# Altium PCB main_pcb.PcbDoc
Units mm, origin at the board's own origin, x right, y up, seen from the top; angles counter-clockwise.
Board outline 20 x 50 mm, 2 copper layers (Top Layer, Bottom Layer); 25 components, 16 nets, 100 pads, 16 vias.
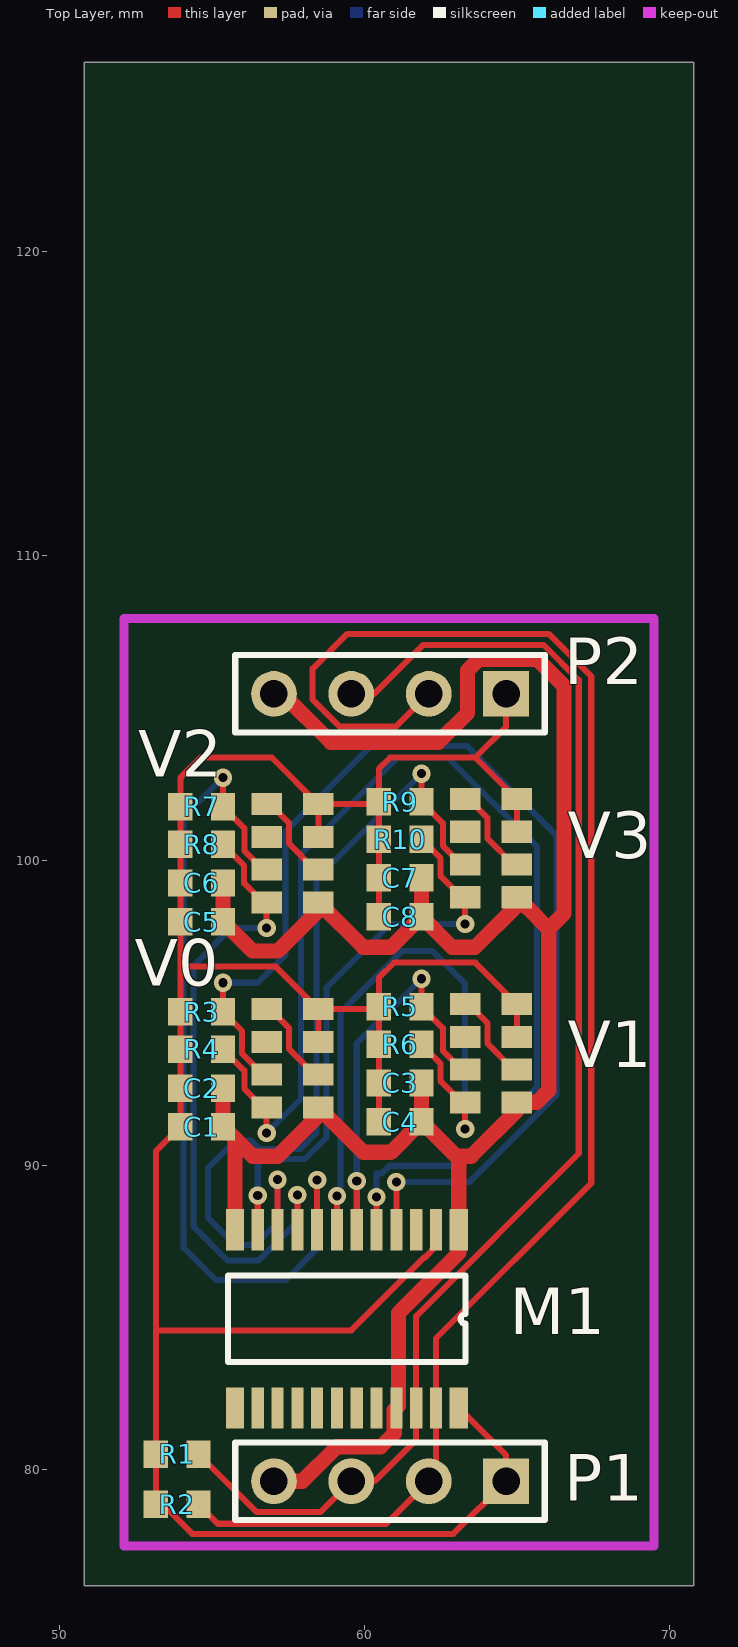
[diagram p0: Top Layer view]
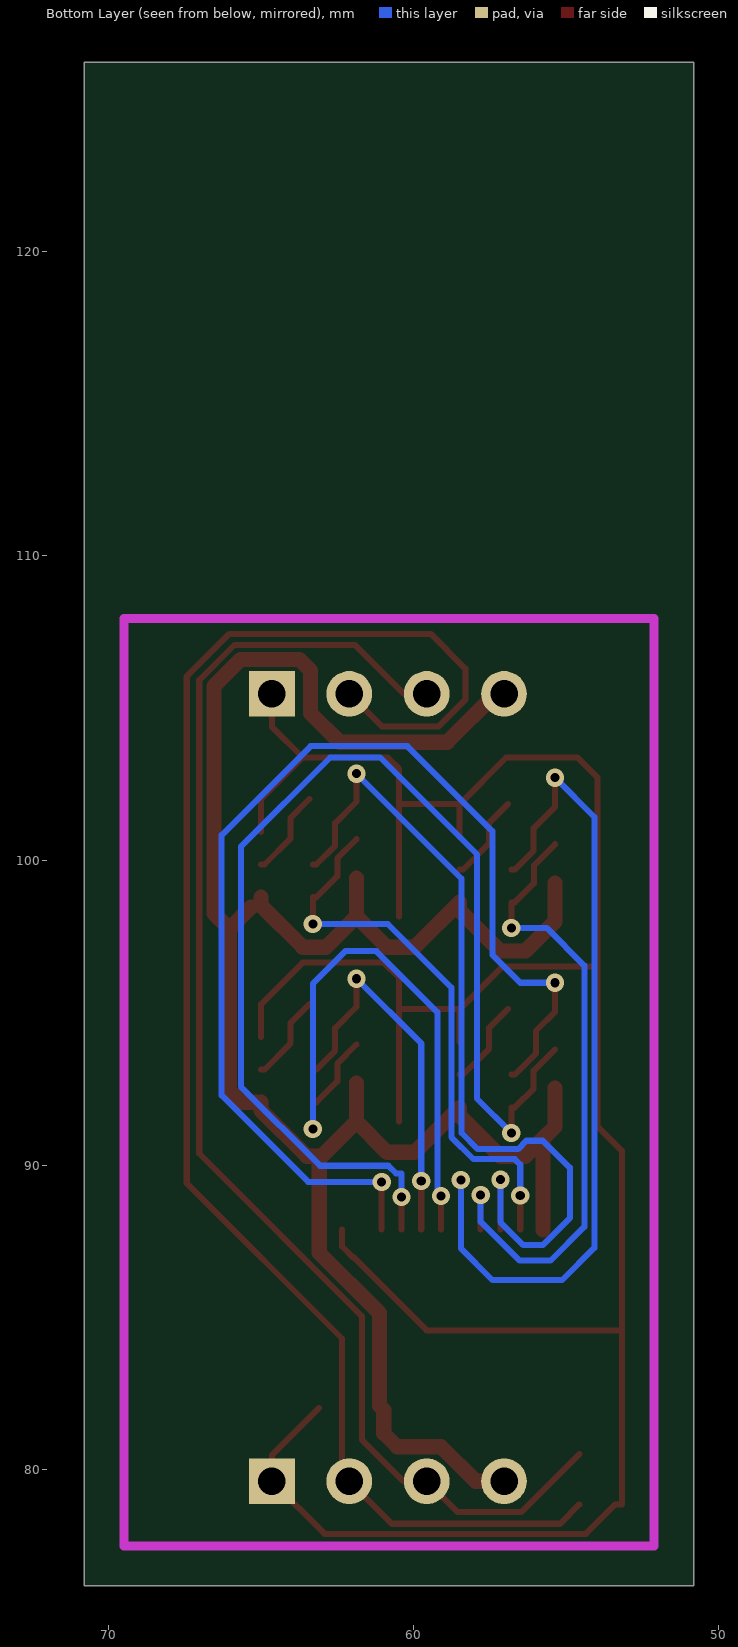
[diagram p1: Bottom Layer view, seen from below]

## Layer stack, top to bottom
Top Solder: solder mask 0.0102, Solder Resist, Dk 3.5
Top Layer: signal copper 0.0356
Dielectric 1: dielectric 0.32, FR-4, Dk 4.8
Bottom Layer: signal copper 0.0356
Bottom Solder: solder mask 0.0102, Solder Resist, Dk 3.5

## Board outline
50.8,76.2 70.8,76.2 70.8,126.2 50.8,126.2

## Design rules (kind name [scope] priority, off if disabled: settings)
Clearance [All] p1: gap=0.13
FabricationTestPointUsage TestPointUsage [All] p1: valid=0 allowmultiple=FALSE
FabricationTestpoint Testpoint [All] p1: side=3 testpointundercomponent=TRUE minsize=1.016 maxsize=2.54 preferedsize=1.524 minholesize=0 maxholesize=1.016 preferedholesize=0.813 testpointgrid=0.025 allowsidetop=TRUE allowsidebottom=TRUE usegrid=TRUE gridtolerance=0
HoleSize [All] p1: absolutevalues=TRUE maxlimit=3.9 minlimit=0.2 maxpercent=80.000 minpercent=20.000
HoleToHoleClearance [All] p1: gap=0.3 allowstackedmicrovias=TRUE
MinimumSolderMaskSliver [All] p1: minsoldermaskwidth=0.1
PlaneConnect [All] p1: planeconnectstyle=Relief reliefexpansion=0.5 reliefentries=4 reliefconductorwidth=0.4 reliefairgap=0.4
PolygonConnect [All] p1: connectstyle=Relief reliefconductorwidth=0.4 reliefentries=4 polygonreliefangle="90 Angle" airgapwidth=0.4
RoutingVias [All] p1: holewidth=0.3 width=0.6 viastyle="Through Hole" minholewidth=0.3 minwidth=0.6 maxholewidth=0.3 maxwidth=0.6
SilkToBoardRegionClearance UnpouredPolygon [All] p2:
SilkToSilkClearance [All] p1: silktosilkclearance=0
SilkToSolderMaskClearance SilkscreenOverComponentPads [IsPad] p1: minsilkscreentomaskgap=0 clearancetoexposedcopper=TRUE
SolderMaskExpansion [All] p1: expansion=-0.01
Width Power_Width [(InNet('5V') OR InNet('3V3') OR InNet('VCC') OR InNet('GND'))] p1: maxlimit=1 minlimit=0.4 preferedwidth=0.5 minimp=50.000000 maximp=50.000000 favimp=50.000000
Width [All] p2: maxlimit=0.2 minlimit=0.2 preferedwidth=0.2 minimp=50.000000 maximp=50.000000 favimp=50.000000
21 further rules are at their usual default settings.

## Components (designator, comment, footprint, x,y, rotation, side; value= is the part's Value field where it differs from the comment)
C1 "Cap" 1608[0603] 54.65,91.263 r180 top
C2 "Cap" 1608[0603] 54.65,92.533 r180 top
C3 "Cap" 1608[0603] 61.166,92.7 r180 top
C4 "Cap" 1608[0603] 61.166,91.43 r180 top
C5 "Cap" 1608[0603] 54.65,97.994 r180 top
C6 "Cap" 1608[0603] 54.65,99.264 r180 top
C7 "Cap" 1608[0603] 61.166,99.431 r180 top
C8 "Cap" 1608[0603] 61.166,98.161 r180 top
M1 "PCA9547" TSSOP24 62.992,87.884 r270 top
P1 "Header 4" HDR1X4 64.643,79.629 r180 top
P2 "Header 4" HDR1X4 64.643,105.471 r180 top
R1 "Res1" 1608[0603] 53.848,80.518 r180 top
R2 "Res1" 1608[0603] 53.848,78.867 r180 top
R3 "Res1" 1608[0603] 54.65,95.036 r180 top
R4 "Res1" 1608[0603] 54.65,93.803 r180 top
R5 "Res1" 1608[0603] 61.166,95.202 r180 top
R6 "Res1" 1608[0603] 61.166,93.97 r180 top
R7 "Res1" 1608[0603] 54.65,101.767 r180 top
R8 "Res1" 1608[0603] 54.65,100.534 r180 top
R9 "Res1" 1608[0603] 61.166,101.933 r180 top
R10 "Res1" 1608[0603] 61.166,100.701 r180 top
V0 "VCNL4040" SOP8 58.333,91.898 r180 top
V1 "VCNL4040" SOP8 64.849,92.065 r180 top
V2 "VCNL4040" SOP8 58.333,98.629 r180 top
V3 "VCNL4040" SOP8 64.849,98.796 r180 top

## Footprints (in the part's own frame and the unit in brackets; to place one, negate y for a bottom-side part, rotate by r counter-clockwise, add the part's x,y. Pads: shape width x height; smd on the part's side, far side on the other; paste and mask are expansions set on the pad)
1608[0603] [mm] "Chip Capacitor, Body 1.6x0.8mm, IPC High Density"
  rect 0.8x0.9 smd: 1(-0.7,0) 2(0.7,0)
  body extent -0.87,-0.48 0.87,0.48, height 1.3
HDR1X4 [mm] "Connector; Header; 4 Position"
  rect 1.5x1.5 hole 0.9: 1(0,0)
  round 1.5 hole 0.9: 2(2.54,0) 3(5.08,0) 4(7.62,0)
  silkscreen extent -1.27,-1.27 8.89,1.27
SOP8 [mm]
  rect 1x0.725 smd: 1(-0.15,0) 2(-0.15,-1.075) 3(-0.15,-2.15) 4(-0.15,-3.225) 5(1.55,-3.225) 6(1.55,-2.15) 7(1.55,-1.075) 8(1.55,0)
TSSOP24 [mm]
  rect 1.35x0.6 smd: 1(0,0.1) 12(0,-7.25) 13(5.85,-7.25) 24(5.85,0.1)
  rect 1.35x0.4 smd: 2(0,-0.65) 3(0,-1.3) 4(0,-1.95) 5(0,-2.6) 6(0,-3.25) 7(0,-3.9) 8(0,-4.55) 9(0,-5.2) 10(0,-5.85) 11(0,-6.5) 14(5.85,-6.5) 15(5.85,-5.85) 16(5.85,-5.2) 17(5.85,-4.55) 18(5.85,-3.9) 19(5.85,-3.25) 20(5.85,-2.6) 21(5.85,-1.95) 22(5.85,-1.3) 23(5.85,-0.65)
  silkscreen extent 1.51,-7.48 4.34,0.33

## Part data
C1 C2 C3 C4 C5 C6 C7 C8: "Capacitor"
P1 P2: "Header, 4-Pin"
R1 R2 R3 R4 R5 R6 R7 R8 R9 R10: "Resistor"
V0 V1 V2 V3: library part Component_1

## Via types
v1: diameter 0.6, hole 0.3, Top Layer to Bottom Layer, 16 vias

## Nets (pads, with @x,y where several pads share a name; then routed paths per layer and width w, separated by ;. In a path a pad name is that pad's centre, name@x,y a point inside that pad or via, vN(x,y) a via of type N, cw(c..) or ccw(c..) an arc to the next point about the centre after c; other vN are vias at no path point)
GND: C1.1 C2.1 C3.1 C4.1 C5.1 C6.1 C7.1 C8.1 M1.1 M1.12 M1.21 P1.4 P2.4 V0.1 V1.1 V2.1 V3.1 | length 76.9
  Top Layer w0.5: C2.1 C1.1 C1.1@55.742,90.871 ; C6.1 C5.1 56.316,97.028 57.15,97.028 58.483,98.361 V2.1 59.957,97.155 60.861,97.155 C8.1 ; M1.12 C1.1@55.742,90.871 ; P1.4 57.965,79.629 59.095,80.759 60.529,80.759 60.972,81.202 60.972,81.964 M1.21 ; P2.4 57.303,105.471 58.888,103.886 62.423,103.886 63.373,104.836 63.373,106.238 63.736,106.601 65.672,106.601 66.548,105.725 66.548,98.263 66.04,97.755 ; M1.21@61.112,82.104 61.112,85.148 63.092,87.128 M1.1 63.092,90.204 ; C3.1 C4.1 ; C7.1 C8.1 ; V1.1 64.999,91.796 63.5,90.297 62.999,90.297 C4.1 ; V3.1 64.999,98.527 63.627,97.155 62.872,97.155 C8.1 ; V1.1@65.15,92.065 65.649,92.065 66.04,92.456 66.04,97.755 ; V3.1@65.324,98.471 66.04,97.755 ; C1.1@55.742,90.871 56.316,90.297 57.15,90.297 58.483,91.63 V0.1 59.957,90.424 60.861,90.424 C4.1
NetC1_2: C1.2 C2.2 C3.2 C4.2 C5.2 C6.2 C7.2 C8.2 M1.2 M1.24 P1.1 P2.1 R1.2 R2.2 R3.2 R4.2 R5.2 R6.2 R7.2 R8.2 R9.2 R10.2 V0.3 V0.4 V1.3 V1.4 V2.3 V2.4 V3.3 V3.4 | length 92
  Top Layer w0.2: 53.95,96.52 57.086,96.52 V0.4 ; V0.3 V0.4 ; V2.3 V2.4 ; R5.2@60.387,95.123 V0.4 ; R9.2@60.387,101.854 V2.4 ; C4.2 C3.2 R6.2 R5.2 60.466,96.153 60.965,96.652 63.637,96.652 V1.4 V1.3 ; C8.2 C7.2 R10.2 R9.2 60.466,103.011 60.838,103.383 63.637,103.383 ; M1.2 62.342,87.334 61.987,86.979 61.96,86.979 59.563,84.582 53.148,84.582 ; M1.24 64.643,80.483 P1.1 62.916,77.902 54.338,77.902 53.373,78.867 R2.2 R1.2 53.148,84.582 ; P2.1 64.643,104.389 63.637,103.383 ; V3.3 V3.4 63.637,103.383 ; 53.148,84.582 53.148,90.461 C1.2 C2.2 R4.2 R3.2 53.95,96.52 C5.2 C6.2 R8.2 R7.2 53.95,102.718 54.61,103.378 56.959,103.378 V2.4
NetM1_4: M1.4 R3.1 V0.7 | length 38
  Top Layer w0.2: v1(55.35,95.99) R3.1 55.98,94.405 55.98,93.663 56.67,92.973 V0.7 ; M1.4 v1(61.042,89.453)
  Bottom Layer w0.2: v1(55.35,95.99) 56.493,95.99 57.404,96.901 57.404,100.965 60.198,103.759 63.373,103.759 66.294,100.838 66.294,92.292 63.455,89.453 v1(61.042,89.453)
NetM1_5: M1.5 R4.1 V0.8 | length 39.5
  Top Layer w0.2: R4.1 56.053,93.1 56.053,92.515 56.67,91.898 V0.8 v1(56.783,91.059) ; M1.5 v1(60.392,88.96)
  Bottom Layer w0.2: v1(56.783,91.059) 57.912,92.188 57.912,100.203 61.092,103.383 62.733,103.383 65.659,100.457 65.659,92.583 63.059,89.983 60.822,89.983 60.568,89.729 60.392,89.729 v1(60.392,88.96)
NetM1_6: M1.6 R5.1 V1.7 | length 12.8
  Top Layer w0.2: M1.6 v1(59.742,89.483) ; v1(61.866,96.122) R5.1 62.569,94.499 62.569,93.757 63.186,93.14 V1.7
  Bottom Layer w0.2: v1(59.742,89.483) 59.742,93.998 v1(61.866,96.122)
NetM1_7: M1.7 R6.1 V1.8 | length 20.8
  Top Layer w0.2: M1.7 v1(59.092,88.99) ; R6.1@61.866,93.967 62.496,93.337 62.496,92.755 63.186,92.065 V1.8 v1(63.299,91.186)
  Bottom Layer w0.2: v1(59.092,88.99) 59.212,89.11 59.212,95.026 61.214,97.028 62.23,97.028 63.299,95.959 v1(63.299,91.186)
NetM1_8: M1.8 R7.1 V2.7 | length 28.8
  Top Layer w0.2: v1(55.35,102.721) R7.1 56.053,101.064 56.053,100.321 56.67,99.704 V2.7 ; M1.8 v1(58.442,89.513)
  Bottom Layer w0.2: v1(55.35,102.721) 54.058,101.429 54.058,87.293 55.118,86.233 57.404,86.233 58.442,87.271 v1(58.442,89.513)
NetM1_9: M1.9 R8.1 V2.8 | length 21.3
  Top Layer w0.2: R8.1 56.047,99.837 56.047,99.252 56.67,98.629 V2.8 v1(56.783,97.79) ; M1.9 v1(57.792,89.02)
  Bottom Layer w0.2: v1(56.783,97.79) 55.626,97.79 54.388,96.552 54.388,87.979 55.499,86.868 56.515,86.868 57.792,88.145 v1(57.792,89.02)
NetM1_10: M1.10 R9.1 V3.7 | length 28.8
  Top Layer w0.2: M1.10 v1(57.142,89.527) ; v1(61.866,102.853) R9.1 62.569,101.23 62.569,100.488 63.186,99.871 V3.7
  Bottom Layer w0.2: v1(57.142,89.527) 57.142,88.13 56.388,87.376 55.753,87.376 54.864,88.265 54.864,89.916 55.753,90.805 56.288,90.805 56.564,90.529 57.89,90.529 58.42,91.059 58.42,99.407 v1(61.866,102.853)
NetM1_11: M1.11 R10.1 V3.8 | length 18.5
  Top Layer w0.2: M1.11 v1(56.492,89.004) ; R10.1 62.496,100.071 62.496,99.486 63.186,98.796 V3.8 v1(63.299,97.917)
  Bottom Layer w0.2: v1(56.492,89.004) 56.492,90.02 56.671,90.199 58.027,90.199 58.75,90.922 58.75,95.834 60.833,97.917 v1(63.299,97.917)
NetM1_22: M1.22 P1.3 P2.3 R1.1 | length 44.7
  Top Layer w0.2: R1.1 56.453,78.613 58.547,78.613 P1.3 60.325,79.629 61.692,80.996 M1.22 61.692,85.049 67.028,90.385 67.028,105.924 65.871,107.081 61.92,107.081 60.31,105.471 P2.3
NetM1_23: M1.23 P1.2 P2.2 R2.1 | length 53.1
  Top Layer w0.2: R2.1 55.183,78.232 60.706,78.232 P1.2 62.342,79.868 M1.23 62.342,84.313 67.437,89.408 67.437,106.045 66.04,107.442 59.436,107.442 58.293,106.299 58.293,105.283 59.182,104.394 61.026,104.394 P2.2 P2.2@62.351,105.471
NetV0_2: V0.2 V0.5 | length 2.9
  Top Layer w0.2: V0.5@56.896,95.123 57.513,94.506 57.513,93.83 58.37,92.973 V0.2
NetV1_2: V1.2 V1.5 | length 3
  Top Layer w0.2: V1.5 63.412,95.29 64.029,94.672 64.029,93.997 64.886,93.14 V1.2
NetV2_2: V2.2 V2.5 | length 2.9
  Top Layer w0.2: V2.5@56.896,101.854 57.513,101.237 57.513,100.561 58.37,99.704 V2.2
NetV3_2: V3.2 V3.5 | length 2.9
  Top Layer w0.2: V3.5@63.412,102.021 64.029,101.403 64.029,100.728 64.886,99.871 V3.2
pads on no net: M1.3 M1.13 M1.14 M1.15 M1.16 M1.17 M1.18 M1.19 M1.20 V0.6 V1.6 V2.6 V3.6

## Keep-outs
Keep-Out Layer:
  lines w0.3: 52.1,77.5 52.1,107.95 69.5,107.95 69.5,77.5 52.1,77.5

## Silkscreen, mask and mechanical layers (free items; w line width, h text height)
Drill Drawing:
  text ".LEGEND" at 75.88,81.28 h1.52
  text "Drill Drawing." at 75.88,78.74 h1.52

## Dimensions
52.1,77.5 to 52.1,107.95 on Mechanical 1
52.1,77.5 to 69.5,77.5 on Mechanical 1